# EAGLE board vulcan1 (EAGLE 7.2.0)
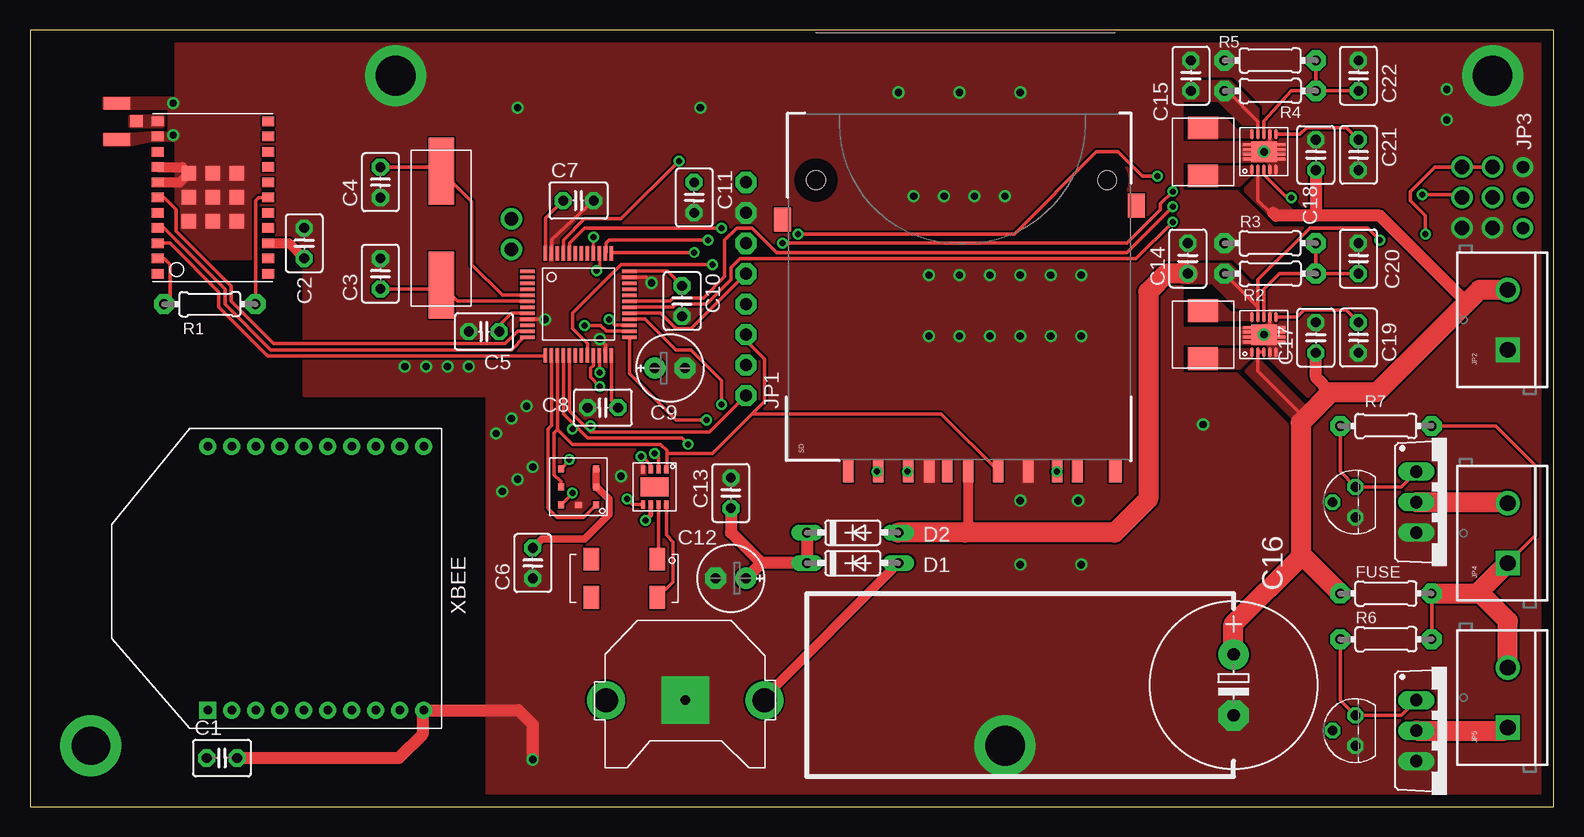
[diagram p0: board, top side]
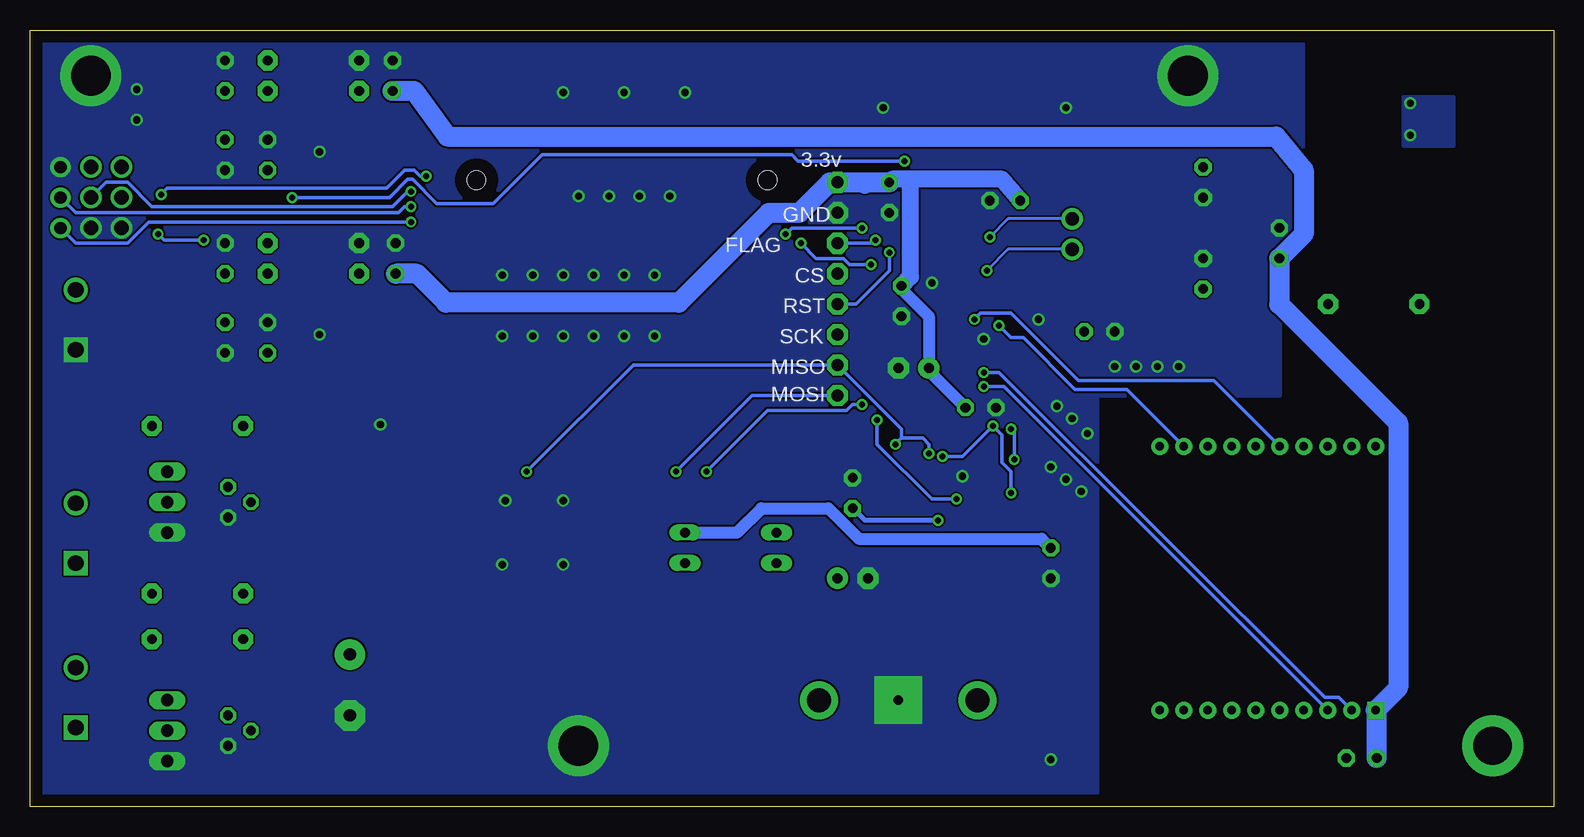
[diagram p1: board, bottom side, seen from below]

Size 127 x 64.77 mm. Coordinates in mm from the lower left corner, seen from the top.
Outline: 0,0 127,0 127,64.77 0,64.77 0,0
Copper layers (1*16): Top 0.035mm / dielectric 1.5mm / Bottom 0.035mm
Design rules "default *": minimum track width 6mil, minimum drill 19mil, track to track 6mil, track to pad 6mil, pad to pad 6mil, via to via 6mil, smd to smd 6mil, copper to edge 40mil, drill to drill 8mil, minimum pad ring 10mil, minimum via ring 8mil, stop-mask expansion 4mil, vias tented up to drill 0mil, thermal gap 10mil

## Footprints (pad centres in the part's own frame; a part is rotated, then mirrored left to right if it is on the bottom)
GPS-MODULE = smd 1 x 0.8: 1 4.6,6.35; 2 4.6,5.08; 3 4.6,3.81; 4 4.6,2.54; 5 4.6,1.27; 6 4.6,0; 7 4.6,-1.27; 8 4.6,-2.54; 9 4.6,-3.81; 10 4.6,-5.08; 11 4.6,-6.35; 12 -4.6,-6.35; 13 -4.6,-5.08; 14 -4.6,-3.81; 15 -4.6,-2.54; 16 -4.6,-1.27; 17 -4.6,0; 18 -4.6,1.27; 19 -4.6,2.54; 20 -4.6,3.81; 21 -4.6,5.08; 22 -4.6,6.35 | smd 1.2 x 1.2: P$1 0,0; P$2 0,2; P$3 -2,2; P$4 -2,0; P$5 -2,-2; P$6 0,-2; P$7 2,-2; P$8 2,0; P$9 2,2
CR1220-THM = drill 2 pad 3.175: +1 -6.604,0; +2 6.604,0 | drill 0.8 pad 3.962 square: - 0,0
LGA-7 = smd 0.6 x 0.5: 1 1.5,1.45; 2 0,1.45; 3 -1.5,1.45; 4 -1.5,-1.45; 5 0,-1.45; 6 1.5,-1.45 | smd 0.5 x 0.6: 7 1.5,0
C025-030X050 = drill 0.813 pad 1.422 octagon: 1 -1.27,0; 2 1.27,0
E2,5-6E = drill 0.813 pad 1.778: + -1.27,0 | drill 0.813 pad 1.778 octagon: - 1.27,0
E5-13 = drill 1.016 pad 2.54: + -2.54,0 | drill 1.016 pad 2.54 octagon: - 2.54,0
DO35-7 = drill 0.813 long: A 3.81,0; C -3.81,0
TDFN-T822-2 = smd 0.7 x 0.35: 1 -1.475,0.975; 2 -1.475,0.325; 3 -1.475,-0.325; 4 -1.475,-0.975; 5 1.475,-0.975; 6 1.475,-0.325; 7 1.475,0.325; 8 1.475,0.975 | smd 1.58 x 2.35: PAD 0,0
0204/7 = drill 0.813 pad 1.676 octagon: 1 -3.81,0; 2 3.81,0
1X08-CLEANBIG = drill 1.016 pad 1.778 octagon: 1 -8.89,0; 2 -6.35,0; 3 -3.81,0; 4 -1.27,0; 5 1.27,0; 6 3.81,0; 7 6.35,0; 8 8.89,0
SCREWTERMINAL-5MM-2 = drill 1.3 pad 2.032 square: 1 0,0 | drill 1.3 pad 2.032: 2 5,0
1X03-CLEANBIG = drill 1.016 pad 1.676: 1 -2.54,0; 2 0,0; 3 2.54,0
TO220BV = drill 1.016 long: D 0,-2.54; G -2.54,-2.54; S 2.54,-2.54
SDCARD_4UCONN = smd 1.8 x 0.9: 1 -1,6.77; 2 -1,4.27; 3 -1,2.52; 4 -1,-0.73; 5 -1,-3.23; 6 -1,-5.73; 7 -1,-8.15; 8 -1,-9.85; 9 -1,9.27; CD -1,1.02 | smd 2 x 1.4: SH@1 20,14.75; SH@2 21.15,-14.75 | smd 1.8 x 1.1: WP -1,-13 | hole 1.55: 23.3,11.94; 23.3,-12.32
TO92 = drill 0.813 octagon: 1 1.27,0; 2 0,1.905; 3 -1.27,0
PWSON-N10 = smd 0.28 x 0.85: 1 -1,-1.475; 2 -0.5,-1.475; 3 0,-1.475; 4 0.5,-1.475; 5 1,-1.475; 6 1,1.475; 7 0.5,1.475; 8 0,1.475; 9 -0.5,1.475; 10 -1,1.475 | smd 0.7 x 0.25: PGND_1 -1.425,0.6; PGND_2 -1.425,0.2; PGND_3 -1.425,-0.2; PGND_4 -1.425,-0.6; PGND_5 1.425,0.6; PGND_6 1.425,0.2; PGND_7 1.425,-0.2; PGND_8 1.425,-0.6 | smd 2.15 x 1.7: PGND_9 0,0
SMA = smd 1.05 x 2.2: 1 -1.5,0.1; 2 1.5,0.1 | smd 1 x 1.05: 3 0,-1.5
HC/49US = smd 5.6 x 2.1: 1 -4.75,0; 2 4.75,0
LQFP48 = smd 1.2 x 0.3: 1 -4.25,2.75; 2 -4.25,2.25; 3 -4.25,1.75; 4 -4.25,1.25; 5 -4.25,0.75; 6 -4.25,0.25; 7 -4.25,-0.25; 8 -4.25,-0.75; 9 -4.25,-1.25; 10 -4.25,-1.75; 11 -4.25,-2.25; 12 -4.25,-2.75; 25 4.25,-2.75; 26 4.25,-2.25; 27 4.25,-1.75; 28 4.25,-1.25; 29 4.25,-0.75; 30 4.25,-0.25; 31 4.25,0.25; 32 4.25,0.75; 33 4.25,1.25; 34 4.25,1.75; 35 4.25,2.25; 36 4.25,2.75 | smd 0.3 x 1.2: 13 -2.75,-4.25; 14 -2.25,-4.25; 15 -1.75,-4.25; 16 -1.25,-4.25; 17 -0.75,-4.25; 18 -0.25,-4.25; 19 0.25,-4.25; 20 0.75,-4.25; 21 1.25,-4.25; 22 1.75,-4.25; 23 2.25,-4.25; 24 2.75,-4.25; 37 2.75,4.25; 38 2.25,4.25; 39 1.75,4.25; 40 1.25,4.25; 41 0.75,4.25; 42 0.25,4.25; 43 -0.25,4.25; 44 -0.75,4.25; 45 -1.25,4.25; 46 -1.75,4.25; 47 -2.25,4.25; 48 -2.75,4.25
ECX-306X = smd 1.3 x 1.9: 1 -2.75,-1.6; 2 2.75,-1.6; 3 2.75,1.6; 4 -2.75,1.6
L-0520LR = smd 1.9 x 2.5: P$1 -2,0; P$2 2,0
2X3 = drill 1.2: 1 -2.54,-2.54; 2 -2.54,0; 3 0,-2.54; 4 0,0; 5 2.54,-2.54; 6 2.54,0
1X2HEADER = drill 1.1 pad 1.778: 0 -2.54,0; 1 0,0
XBEE = drill 0.7 pad 1.422 square: 1 -11,5.5 | drill 0.7 pad 1.422: 2 -11,3.5; 3 -11,1.5; 4 -11,-0.5; 5 -11,-2.5; 6 -11,-4.5; 7 -11,-6.5; 8 -11,-8.5; 9 -11,-10.5; 10 -11,-12.5; 11 11,-12.5; 12 11,-10.5; 13 11,-8.5; 14 11,-6.5; 15 11,-4.5; 16 11,-2.5; 17 11,-0.5; 18 11,1.5; 19 11,3.5; 20 11,5.5

## Placement (x,y rotation side)
A2200-A  A2200-A  [GPS-MODULE]  15.24,50.8 180 top
BKP-BATT  [CR1220-THM]  54.61,8.89 180 top
BMP1  BMP183  [LGA-7]  45.72,26.67 270 top
C1  .1u  [C025-030X050]  16,4.06 0 top
C2  .1u  [C025-030X050]  22.86,46.99 90 top
C3  18pf  [C025-030X050]  29.21,44.45 90 top
C4  18pf  [C025-030X050]  29.21,52.07 270 top
C5  10n  [C025-030X050]  37.85,39.62 180 top
C6  .1u  [C025-030X050]  41.91,20.32 270 top
C7  .1u  [C025-030X050]  45.72,50.55 0 top
C8  .1u  [C025-030X050]  47.75,33.27 180 top
C9  4.7u  [E2,5-6E]  53.34,36.58 0 top
C10  .1u  [C025-030X050]  54.36,42.16 270 top
C11  .1u  [C025-030X050]  55.37,50.8 270 top
C12  1u  [E2,5-6E]  58.42,19.05 180 top
C13  .1u  [C025-030X050]  58.42,26.16 90 top
C14  .1u  [C025-030X050]  96.52,45.72 90 top
C15  .1u  [C025-030X050]  96.77,60.96 90 top
C16  4700uf  [E5-13]  100.33,10.16 270 top
C17  .1u  [C025-030X050]  107.19,39.12 90 top
C18  .1u  [C025-030X050]  107.19,54.36 90 top
C19  .1u  [C025-030X050]  110.74,39.12 270 top
C20  10pf  [C025-030X050]  110.74,45.72 90 top
C21  .1u  [C025-030X050]  110.74,54.36 270 top
C22  10pf  [C025-030X050]  110.74,60.96 90 top
D1  [DO35-7]  68.58,20.32 0 top
D2  [DO35-7]  68.58,22.86 0 top
DS1  DS1347  [TDFN-T822-2]  52.07,26.67 270 top
FUSE  FUSE  [0204/7]  113.03,17.78 0 top
JP1  [1X08-CLEANBIG]  59.69,43.18 90 top
JP2  M025MM  [SCREWTERMINAL-5MM-2]  123.19,38.1 90 top
JP3  [1X03-CLEANBIG]  124.46,50.8 90 top
JP4  M025MM  [SCREWTERMINAL-5MM-2]  123.19,20.32 90 top
JP5  M025MM  [SCREWTERMINAL-5MM-2]  123.19,6.6 90 top
Q1  IRF540  [TO220BV]  118.11,6.35 270 top
Q2  IRF540  [TO220BV]  118.11,25.4 270 top
R1  10k  [0204/7]  14.99,41.91 180 top
R2  560k  [0204/7]  103.38,44.45 180 top
R3  100k  [0204/7]  103.38,46.99 0 top
R4  560k  [0204/7]  103.38,59.69 180 top
R5  100k  [0204/7]  103.38,62.23 0 top
R6  10k  [0204/7]  113.03,13.97 0 top
R7  10k  [0204/7]  113.03,31.75 0 top
SD  SD_CARD_SOCKET4UCON  [SDCARD_4UCONN]  77.47,28.96 90 top
T1  2N3904  [TO92]  110.49,6.35 90 top
T2  2N3904  [TO92]  110.49,25.4 90 top
TPS63060-A  TPS63060  [PWSON-N10]  102.87,39.37 0 top
TPS63060-B  TPS63060  [PWSON-N10]  102.87,54.61 0 top
U$1  SMA  [SMA]  7.37,57.15 90 top
U$2  HC/49US(AT49)  [HC/49US]  34.29,48.26 90 top
U$3  STM32F103XX-48PIN  [LQFP48]  45.72,41.91 0 top
U$4  ECX-306X  [ECX-306X]  49.53,19.05 180 top
U$5  ASPI-0520LR  [L-0520LR]  97.79,39.37 90 top
U$6  ASPI-0520LR  [L-0520LR]  97.79,54.61 90 top
U$7  2X3  [2X3]  121.92,50.8 270 top
U$8  1X2HEADER  [1X2HEADER]  40.13,49.02 90 top
XBEE  XBEE  [XBEE]  20.32,19.05 90 top

## Library data of the parts
A2200-A BMP1 DS1 TPS63060-A TPS63060-B U$1-U$7 = vulcan-1
BKP-BATT C1-C22 D1 D2 FUSE JP1 JP3 R1-R7 XBEE = adafruit
JP2 JP4 JP5 = SparkFun-Connectors; STOREFRONT_ID: PRT-08432
Q1 Q2 = transistor-power
SD = SparkFun-Connectors
T1 T2 = transistor
U$8 = 1x2 header

## Nets
3.3A: BMP1.2 BMP1.3 C6.1 C7.1 C8.1 C9.+ C10.1 C11.1 C14.1 D2.A JP1.8 R2.2 SD.4 TPS63060-A.9 U$3.24 U$3.36 U$3.48 U$7.1 U$7.2
3.3B: A2200-A.20 C1.1 C2.1 C15.1 R4.2 TPS63060-B.9 XBEE.1
ACC-CS: JP1.5 U$3.29
ACC-FLAG: JP1.6 U$3.38
ACC-RST: JP1.4 U$3.37
BOOT0: U$3.44 U$7.3
BOOT1: U$3.20 U$7.4
EMATCH1: T2.2
EMATCH2: T1.2
GND: A2200-A.7 A2200-A.8 A2200-A.10 A2200-A.P$1 A2200-A.P$2 A2200-A.P$3 A2200-A.P$4 A2200-A.P$5 A2200-A.P$6 A2200-A.P$7 A2200-A.P$8 A2200-A.P$9 BKP-BATT.- BMP1.7 C1.2 C2.2 C3.2 C4.2 C5.2 C6.2 C7.2 C8.2 C9.- C10.2 C11.2 C12.- C13.2 C14.2 C15.2 C16.- C17.2 C18.2 C19.2 C20.2 C21.2 C22.2 DS1.4 JP1.7 JP2.1 JP3.3 Q1.S Q2.S R3.1 R5.1 SD.3 SD.6 T1.3 T2.3 TPS63060-A.4 TPS63060-A.5 TPS63060-A.7 TPS63060-A.PGND_1 TPS63060-A.PGND_2 TPS63060-A.PGND_3 TPS63060-A.PGND_4 TPS63060-A.PGND_5 TPS63060-A.PGND_6 TPS63060-A.PGND_7 TPS63060-A.PGND_8 TPS63060-A.PGND_9 TPS63060-B.4 TPS63060-B.5 TPS63060-B.7 TPS63060-B.PGND_1 TPS63060-B.PGND_2 TPS63060-B.PGND_3 TPS63060-B.PGND_4 TPS63060-B.PGND_5 TPS63060-B.PGND_6 TPS63060-B.PGND_7 TPS63060-B.PGND_8 TPS63060-B.PGND_9 U$1.1 U$1.2 U$3.9 U$3.23 U$3.35 U$3.47 U$7.5 U$7.6 XBEE.10
GPS-ANT: A2200-A.11 U$1.3
GPS-CS: A2200-A.6 U$3.11
N$1: Q2.G R7.1 T2.1
N$2: C5.1 U$3.8
N$3: TPS63060-B.1 U$6.P$1
N$4: TPS63060-B.10 U$6.P$2
N$5: TPS63060-A.1 U$5.P$1
N$6: TPS63060-A.10 U$5.P$2
N$7: DS1.7 U$4.1
N$8: DS1.8 U$4.4
N$9: C3.1 U$2.1 U$3.6
N$10: C4.1 U$2.2 U$3.5
N$11: C19.1 TPS63060-A.6
N$12: C12.+ C13.1 D1.C D2.C DS1.6
N$13: JP4.2 Q2.D
N$14: C20.1 R2.1 R3.2 TPS63060-A.8
N$15: C22.1 R4.1 R5.2 TPS63060-B.8
N$16: Q1.G R6.1 T1.1
N$17: JP5.1 Q1.D
N$18: C21.1 TPS63060-B.6
N$20: A2200-A.2 R1.2
N$21: A2200-A.17 R1.1
N$22: U$3.39 U$8.0
N$23: U$3.40 U$8.1
PS-CS: BMP1.1 U$3.14
RTC-CS: DS1.5 U$3.25
SD-CS: SD.1 U$3.28
SPI-MISO: BMP1.4 DS1.2 JP1.2 SD.7 U$3.16
SPI-MOSI: BMP1.6 DS1.3 JP1.1 SD.2 U$3.17
SPI-SCK: BMP1.5 DS1.1 JP1.3 SD.5 U$3.15
USART1-RX: JP3.2 U$3.31
USART1-TX: JP3.1 U$3.30
USART2-RX: A2200-A.3 U$3.13
USART2-TX: A2200-A.4 U$3.12
USART3-CTS: U$3.26 XBEE.12
USART3-RTS: U$3.27 XBEE.16
USART3-RX: U$3.22 XBEE.2
USART3-TX: U$3.21 XBEE.3
V-BKP: BKP-BATT.+1 D1.A
VB-CS: TPS63060-B.3 U$3.45
VBAT: C16.+ C17.1 C18.1 FUSE.1 JP2.2 TPS63060-A.2 TPS63060-A.3 TPS63060-B.2
VBAT-F: FUSE.2 JP4.1 JP5.2 R6.2 R7.2

## Tracks (layer width: path | path; a pad name or v marks a point on that pad's centre or on a via)
3.3A  (via drill 0.5)
  Top 0.305: TPS63060-A.9 102.37,41.65 | 102.37,41.65 R2.2 | U$3.36 53.13,44.66 C10.1 | U$3.48 42.97,49.07 C7.1 | U$3.24 48.47,33.83 C8.1 | 102.37,41.65 102.37,43.95 106.68,48.26 111.51,48.26 v112.52,47.24 | v116.33,47.75 116.33,49.28 115.06,50.55 115.06,51.31 117.09,53.34 U$7.1 U$7.2
  Top 0.61: BMP1.3 BMP1.2 47.24,26.67 48.26,25.65 48.26,24.38 46.23,22.35 42.67,22.35 C6.1
  Top 0.813: SD.4 78.2,23.08 77.98,22.86
  Top 1.676: C14.1 94.74,44.45 93.22,42.93 93.22,25.65 90.42,22.86 77.98,22.86 D2.A
  Bottom 0.305: v112.52,47.24 115.82,47.24 v116.33,47.75
  Bottom 1.016: C10.1 54.36,43.18 52.07,40.89 C9.+ 52.07,36.32 C8.1 | D2.A 68.07,22.86 66.04,24.89 60.45,24.89 57.91,22.35 42.67,22.35 C6.1
  Bottom 1.422: 57.4,51.82 57.66,52.07 | C7.1 45.97,52.32 53.59,52.32 | 53.59,52.32 55.12,52.32 C11.1 | 53.59,52.32 53.59,44.2 C10.1
  Bottom 1.676: C11.1 57.66,52.07 JP1.8 60.33,52.07 62.87,49.53 65.41,49.53 72.9,42.04 92.33,42.04 94.74,44.45 C14.1
  pour Top (no thermals): 102.36,41.66 100.58,41.66 98.55,43.69 96.01,43.69 96.01,45.21 100.08,45.21 102.36,42.93
3.3B
  Top 0.305: TPS63060-B.9 102.37,57.14 99.82,59.69 R4.2
  Top 0.813: A2200-A.20 21.59,46.99 C2.1
  Bottom 1.676: C15.1 95,59.69 92.2,55.88 23.11,55.88 20.83,53.09 20.83,47.75 C2.1 22.86,41.91 12.95,32 12.95,9.92 XBEE.1 14.73,7.96 C1.1
  pour Top (no thermals): 102.36,56.9 101.09,56.9 99.06,58.93 96.01,58.93 96.01,60.45 100.08,60.45 102.36,58.17
ACC-CS
  Top 0.305: JP1.5 55.12,39.88 53.85,39.88 52.57,41.16 U$3.29
ACC-FLAG  (via drill 0.5)
  Top 0.305: U$3.38 48.01,46.2 48.01,46.99 48.26,47.24 v56.52,47.24
  Bottom 0.305: v56.52,47.24 56.77,46.99 JP1.6
ACC-RST  (via drill 0.5)
  Top 0.305: U$3.37 48.54,46.23 v55.37,46.23
  Bottom 0.305: v55.37,46.23 55.37,44.7 58.17,41.91 JP1.4
BOOT0  (via drill 0.5)
  Top 0.305: U$3.44 44.97,47 46.23,48.26 v57.66,48.26 | v116.08,51.05 119.13,51.05 U$7.3 | v93.98,52.58 92.71,52.58 90.68,54.61 88.9,54.61 82.04,47.75 v64.01,47.75
  Bottom 0.305: v57.66,48.26 63.5,48.26 v64.01,47.75 | v93.98,52.58 94.49,52.58 95,53.09 95.76,53.09 97.28,51.56 115.57,51.56 v116.08,51.05
BOOT1  (via drill 0.5)
  Top 0.305: v56.9,45.21 49.28,45.21 45.21,41.15 45.21,39.88 46.48,38.61 46.48,37.67 U$3.20 | v62.74,46.99 91.44,46.99 94.23,49.78 94.23,50.29 v95.25,51.31
  Bottom 0.305: v56.9,45.21 58.67,45.21 59.18,45.72 61.47,45.72 v62.74,46.99 | v95.25,51.31 95.5,51.31 96.77,50.04 116.84,50.04 118.87,52.07 120.65,52.07 U$7.4
GND  (via drill 0.6, 3.3 pad 5.08)
  Top 0.305: U$3.47 43.47,47.28 C7.2 | U$3.35 51.34,44.16 v51.82,43.69 | U$3.9 42.91,40.66 v42.93,40.64 | U$3.23 47.97,38.52 v47.5,38.99 | TPS63060-B.7 103.37,55.11 TPS63060-B.PGND_9 | TPS63060-A.7 103.37,39.87 TPS63060-A.PGND_9
  Top 0.813: A2200-A.7 12.51,52.07 A2200-A.P$7 12.7,53.34 A2200-A.8
  Top 1.016: C1.2 30.73,4.06 32.77,6.1 32.77,8 XBEE.10 40.72,8.05 41.91,6.86 v41.91,3.94
  other vias: 11.94,58.67 11.94,56.01 49.28,27.56 41.91,28.32 40.64,27.3 39.37,26.29 41.4,33.4 40.13,32.38 38.86,31.11 36.58,36.7 34.8,36.7 33.02,36.7 31.24,36.7 76.2,50.93 78.74,50.93 81.28,50.93 73.66,50.93 72.39,59.56 55.88,58.29 40.64,58.29 82.55,59.56 77.47,59.56 118.11,57.28 118.11,59.82 82.55,25.53 82.55,20.19 87.38,25.53 87.63,20.19 74.93,44.32 77.47,44.32 80.01,44.32 82.55,44.32 85.09,44.32 87.63,44.32 87.63,39.24 82.55,39.24 77.47,39.24 74.93,39.24 80.01,39.24 85.09,39.24 97.79,31.88 30.48,60.96 121.92,60.96 81.28,5.08 102.87,54.61 102.87,39.37
  pour Top (no thermals): 10.16,56.13 8.38,56.01 6.22,56.01 6.22,55.24 8.26,55.24 10.03,55.63 11.05,55.63 11.05,56.13
  pour Top (no thermals): 10.92,56.13 11.68,56.13 11.68,58.29 6.22,58.29 6.22,59.05 12.32,59.05 12.32,55.63 10.92,55.63
  pour Bottom (no thermals): 12.45,59.18 8.38,59.18 8.38,55.12 12.45,55.12
  pour Bottom (no thermals): 20.95,69.85 20.95,48.26 22.86,45.72 22.86,41.91 22.86,34.29 38.1,34.29 38.1,-6.35 133.35,-6.35 133.35,69.85
  pour Top (no thermals): 12.19,68.58 12.19,45.72 22.86,45.72 22.86,34.29 38.1,34.29 38.1,-5.08 96.01,-5.33 96.01,68.58
  pour Top (no thermals): 96.01,39.88 102.87,39.88 102.87,43.18 100.33,45.72 96.01,45.72 96.01,51.31 100.58,51.31 103.63,48.26 106.68,48.26 106.93,48.51 106.93,49.28 102.36,53.85 96.01,53.85 96.01,55.37 102.62,55.37 102.87,55.63 102.87,58.42 100.33,60.96 96.01,60.96 96.01,68.58 129.54,68.58 129.54,-5.08 96.01,-5.08 96.01,36.07 100.58,36.07 100.84,35.81 106.17,30.48 106.68,30.48 106.68,33.78 106.68,34.04 102.11,38.61 96.01,38.61
GPS-ANT
  pour Top (no thermals): 8.38,57.53 11.05,57.53 11.05,56.77 8.38,56.77
GPS-CS
  Top 0.305: U$3.11 40.68,39.66 39.62,38.61 20.32,38.61 16.76,42.16 16.76,43.43 12.19,48.01 12.19,49.78 11.18,50.8 A2200-A.6
N$1
  Top 0.305: R7.1 109.22,27.94 T2.1 114.3,26.67 Q2.G
N$2
  Top 0.305: U$3.8 40.14,41.16 39.12,40.13 C5.1
N$3
  pour Top (no thermals): 101.85,53.34 98.81,53.34 98.81,51.82 100.84,51.82 101.85,52.83
N$4
  pour Top (no thermals): 101.85,56.39 100.58,56.39 99.57,57.4 98.81,57.4 98.81,55.88 101.85,55.88
N$5
  pour Top (no thermals): 101.85,38.1 98.81,38.1 98.81,36.58 100.84,36.58 101.85,37.59
N$6
  pour Top (no thermals): 101.85,41.15 100.08,41.15 99.06,42.16 98.81,42.16 98.81,40.64 101.85,40.64
N$7
  Top 0.305: DS1.7 52.4,20.77 U$4.1
N$8
  Top 0.305: DS1.8 53.05,22.65 53.59,22.1 53.59,18.76 U$4.4
N$9
  Top 0.305: U$3.6 35.64,42.16 U$2.1 33.96,43.18 C3.1
N$10
  Top 0.305: U$3.5 39.38,42.66 36.83,45.21 36.83,50.47 U$2.2 33.96,53.34 C4.1
N$11
  Top 0.305: TPS63060-A.6 105.61,40.84 106.17,41.4 109.73,41.4 C19.1
N$12  (via drill 0.5)
  Top 0.406: DS1.6 51.74,24.31 v51.31,23.88
  Top 1.016: D2.C D1.C 60.96,20.32 | 60.96,20.32 C12.+ | C13.1 58.42,22.86 60.96,20.32
  Bottom 0.406: v51.31,23.88 57.4,23.88 C13.1
N$13
  Top 1.676: Q2.D 123.11,25.4 JP4.2
N$14
  Top 0.305: R3.2 R2.1 | TPS63060-A.8 102.87,43.18 104.14,44.45 R2.1 | R2.1 C20.1
N$15
  Top 0.305: R5.2 R4.1 | R4.1 105.16,59.69 102.87,57.15 TPS63060-B.8 | C22.1 R4.1
N$16
  Top 0.305: R6.1 109.22,8.89 T1.1 114.3,7.62 Q1.G
N$17
  Top 1.676: Q1.D 122.94,6.35 JP5.1
N$18
  Top 0.305: TPS63060-B.6 105.87,56.09 106.43,56.64 109.73,56.64 C21.1
N$19  (via drill 3.2 pad 5.08)
  other vias: 5.08,5.08
N$20
  Top 0.305: A2200-A.2 11.18,45.72 11.68,45.21 11.68,42.42 R1.2
N$21
  Top 0.305: A2200-A.17 19.05,50.8 18.8,50.55 R1.1
N$22  (via drill 0.5)
  Top 0.254: U$3.39 47.5,46.13 47.5,44.96 v47.24,44.7
  Bottom 0.254: U$8.0 45.47,46.48 v47.24,44.7
N$23  (via drill 0.5)
  Top 0.254: U$3.40 46.99,46.18 v46.99,47.5
  Bottom 0.254: U$8.1 45.47,49.02 v46.99,47.5
PS-CS
  Top 0.305: U$3.14 43.47,31.79 43.18,31.5 43.18,24.89 43.94,24.13 46.13,24.13 BMP1.1
RTC-CS  (via drill 0.5)
  Top 0.305: U$3.25 49.97,36.14 53.85,32.26 v56.39,32.26 | DS1.5 50.24,25.2 v49.78,25.65
  Bottom 0.305: v49.78,25.65 51.82,25.65 56.39,30.23 v56.39,32.26
SD-CS  (via drill 0.5)
  Top 0.305: U$3.28 51.29,40.66 53.85,38.1 55.12,38.1 57.66,35.56 v57.66,33.53 | v70.61,27.94 70.68,27.94 SD.1
  Bottom 0.305: v57.66,33.53 58.42,33.53 58.93,33.02 65.53,33.02 v70.61,27.94
SPI-MISO  (via drill 0.5)
  Top 0.305: U$3.16 44.47,32.75 45.47,31.75 | 45.47,31.75 46.48,30.73 54.36,30.73 v54.86,30.23 | v45.21,31.5 45.47,31.75 | v44.96,28.96 44.96,28.86 BMP1.4 | DS1.2 52.4,29.14 v52.07,29.46 | SD.7 v85.6,27.94
  Bottom 0.305: v44.96,28.96 44.96,31.24 v45.21,31.5 | v52.07,29.46 52.07,30.23 52.58,30.73 54.36,30.73 | 54.36,30.73 v54.86,30.23 | 54.36,30.73 54.36,31.5 JP1.2 76.71,36.83 v85.6,27.94
SPI-MOSI  (via drill 0.5)
  Top 0.305: U$3.17 44.97,33.01 46.48,31.5 | 46.48,31.5 46.74,31.24 56.64,31.24 JP1.1 | v46.74,31.75 46.48,31.5 | v45.21,26.16 45.21,26.11 BMP1.6 | DS1.3 51.74,28.52 51.05,29.21 v50.93,29.21 | SD.2 73.17,27.96 v73.15,27.94
  Bottom 0.305: v45.21,26.16 45.21,27.94 45.97,28.7 45.97,30.99 v46.74,31.75 49.28,29.21 v50.93,29.21 | JP1.1 66.8,34.29 v73.15,27.94
SPI-SCK
  Top 0.305: U$3.15 43.97,31.47 | 43.97,31.47 45.21,30.23 52.58,30.23 53.09,29.72 53.09,29.46 | BMP1.5 44.27,27.1 43.69,27.69 43.69,31.19 43.97,31.47 | 53.09,29.46 53.09,28.19 DS1.1 | JP1.3 59.69,38.86 61.21,37.34 61.21,33.78 60.2,32.77 | 60.2,32.77 56.9,29.46 53.09,29.46 | 60.2,32.77 75.95,32.77 80.76,27.96 | SD.5 80.76,27.96 | 80.76,27.96 80.77,27.94
USART1-RX  (via drill 0.5)
  Top 0.305: U$3.31 53.34,42.16 53.59,42.42 56.13,42.42 57.91,44.2 57.91,47.24 58.93,48.26 60.2,48.26 62.23,46.23 91.44,46.23 v95.25,50.04
  Bottom 0.305: v95.25,50.04 95.76,50.04 96.27,49.53 123.19,49.53 JP3.2
USART1-TX  (via drill 0.5)
  Top 0.305: U$3.30 53.6,41.66 53.85,41.91 56.39,41.91 58.42,43.94 58.42,44.96 59.18,45.72 92.2,45.72 v95.25,48.77
  Bottom 0.305: v95.25,48.77 117.09,48.77 118.87,46.99 123.19,46.99 JP3.1
USART2-RX
  Top 0.305: A2200-A.3 11.68,46.99 15.75,42.93 15.75,41.66 19.81,37.59 42.9,37.59 U$3.13
USART2-TX
  Top 0.305: U$3.12 41.19,39.16 40.13,38.1 20.07,38.1 16.26,41.91 16.26,43.18 11.18,48.26 A2200-A.4
USART3-CTS  (via drill 0.5)
  Top 0.305: U$3.26 48.04,39.66 47.57,40.13 v46.23,40.13
  Bottom 0.305: XBEE.12 35.57,34.8 39.88,34.8 44.2,39.12 45.21,39.12 v46.23,40.13
USART3-RTS  (via drill 0.5)
  Top 0.305: U$3.27 48.74,40.16 v48.26,40.64
  Bottom 0.305: XBEE.16 28.33,35.56 39.62,35.56 45.21,41.15 47.75,41.15 v48.26,40.64
USART3-RX  (via drill 0.5)
  Top 0.305: U$3.22 47.47,36.35 v47.5,36.2
  Bottom 0.305: v47.5,36.2 46.23,36.2 19.05,9.14 17.91,9.14 XBEE.2
USART3-TX  (via drill 0.5)
  Top 0.305: U$3.21 46.97,36.81 46.74,36.58 46.74,35.81 v47.5,35.05
  Bottom 0.305: v47.5,35.05 45.82,35.05 XBEE.3
V-BKP
  Top 0.813: BKP-BATT.+1 61.21,9.14 D1.A
VB-CS  (via drill 0.5)
  Top 0.305: TPS63060-B.3 102.87,52.7 104.65,50.93 105.03,50.93 v105.16,50.8 | U$3.45 44.47,47.26 46.23,49.02 49.28,49.02 v54.1,53.85
  Bottom 0.305: v105.16,50.8 97.03,50.8 95.5,52.32 95.12,52.32 93.09,50.29 88.39,50.29 84.33,54.36 63.5,54.36 62.99,53.85 v54.1,53.85
VBAT
  Top 0.305: TPS63060-B.2 102.37,50.54 103.38,49.53 103.63,49.53 106.17,49.53 | 106.3,32.38 102.37,36.31 TPS63060-A.2 TPS63060-A.3
  Top 1.016: 108.46,34.54 107.19,35.81 C17.1 | 120.9,42.93 119.76,42.04 112.52,49.28 107.19,49.28 | 107.19,49.28 103.89,49.28 103.63,49.53 | C18.1 107.19,49.28
  Top 1.676: JP2.2 120.82,43.1 119.76,42.04 112.27,34.54 108.46,34.54 106.3,32.38 105.92,32 105.92,21.08 106.05,20.95 | 106.05,20.95 FUSE.1 | C16.+ 100.33,15.24 106.05,20.95
  pour Top (no thermals): 102.36,37.34 101.35,36.32 105.92,31.75 106.93,32.77
  pour Top (no thermals): 102.36,52.58 101.35,51.56 101.35,51.31 103.63,49.02 105.66,49.28
VBAT-F
  Top 0.305: R7.2 122.17,31.75 125.48,28.45 125.48,22.61 JP4.1 | FUSE.2 R6.2
  Top 1.676: FUSE.2 120.65,17.78 120.78,17.91 | 120.78,17.91 123.19,15.49 JP5.2 | JP4.1 120.78,17.91

## Text on the board
bPlace: 3.3v | GND | FLAG | CS | RST | SCK | MISO | MOSI